# Altium PCB R-G-B_LED Module.PcbDoc
Units mm, origin at the board's own origin, x right, y up, seen from the top; angles counter-clockwise.
Board outline 30 x 18.5 mm, 2 copper layers (Top Layer, Bottom Layer), stack 1.571 mm thick; 3 components, 3 nets, 11 pads, 0 vias.
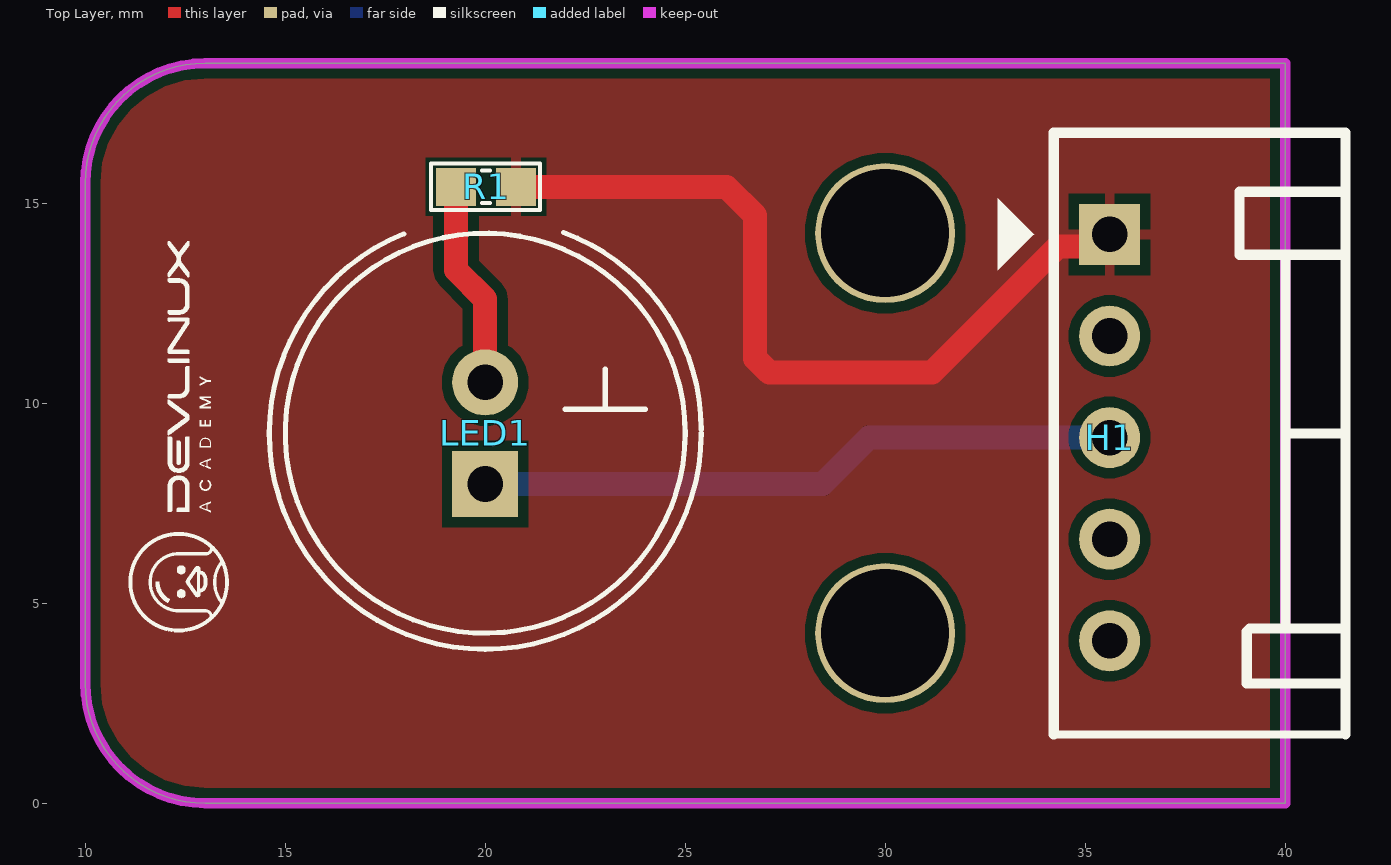
[diagram p0: Top Layer view]
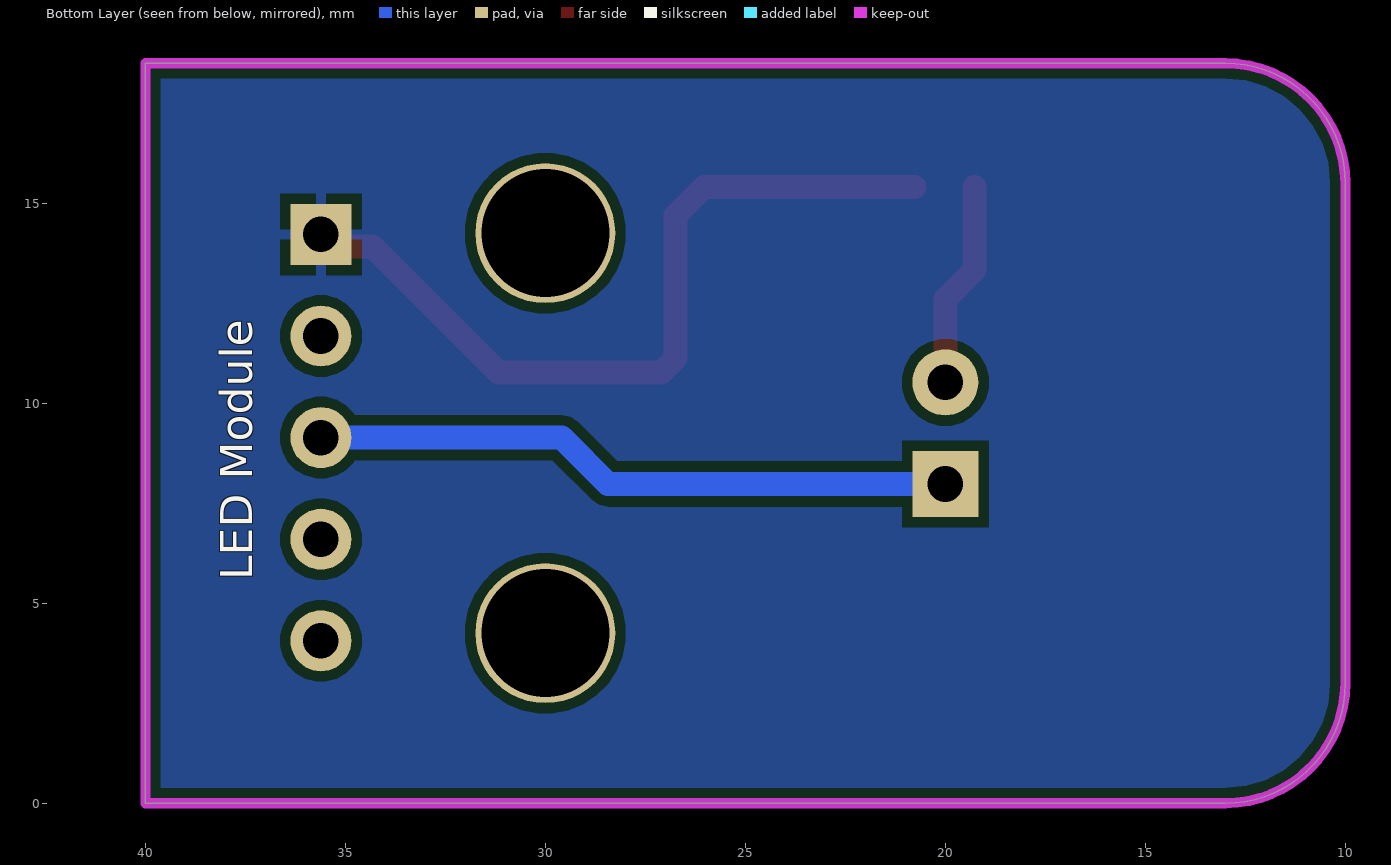
[diagram p1: Bottom Layer view, seen from below]

## Layer stack, top to bottom
Top Solder: solder mask 0.0102, Solder Resist, Dk 3.5
Top Layer: signal copper 0.0356
Dielectric 1: dielectric 1.5, FR-4, Dk 4.8
Bottom Layer: signal copper 0.0356
Bottom Solder: solder mask 0.0102, Solder Resist, Dk 3.5

## Board outline
10,3 ccw(c13,3) 13,0 40,0 40,18.5 13,18.5 ccw(c13,15.5) 10,15.5

## Design rules (kind name [scope] priority, off if disabled: settings)
Clearance [All] p1: gap=0.254 ignorepadtopadclearanceinfootprint=FALSE except(0: Arc-Hole Track-Hole SMDPad-Hole THPad-Hole Via-Hole Fill-Hole Poly-Hole Region-Hole Text-Hole; 0.178: Arc-SMDPad Arc-THPad Track-SMDPad Track-THPad SMDPad-SMDPad SMDPad-THPad THPad-THPad)
PolygonConnect [All] p1: connectstyle=Relief reliefconductorwidth=0.254 reliefentries=4 polygonreliefangle="90 Angle" airgapwidth=0.254
RoomDefinition "R-G-B_LED Module" [InComponentClass('R-G-B_LED Module')] p1: confinementstyle=ConfineIn formatcopy=TRUE lockcomponents=FALSE outline 63.664,8.314 77.38,8.314 77.38,39.556 63.664,39.556
RoutingVias [All] p1: holewidth=0.4 width=0.8 viastyle="Through Hole" minholewidth=0.3 minwidth=0.6 maxholewidth=0.5 maxwidth=1
SolderMaskExpansion [All] p1: expansion=0.102 istentingtop=FALSE
Width +5V [All] p1: maxlimit=0.6 minlimit=0.4 preferedwidth=0.5
Width NET [All] p2: maxlimit=0.5 minlimit=0.3 preferedwidth=0.4
30 further rules are at their usual default settings.

## Components (designator, comment, footprint, x,y, rotation, side; value= is the part's Value field where it differs from the comment)
H1 "5P 2.54" "Header 5P DC 2.54" 35.61,14.22 r0 top
LED1 "LED 10mm" LED2-2.54-D10MM 20,9.25 r90 top
R1 "470" "tro smd 0603" 20.02,15.41 r180 top

## Footprints (in the part's own frame and the unit in brackets; to place one, negate y for a bottom-side part, rotate by r counter-clockwise, add the part's x,y. Pads: shape width x height; smd on the part's side, far side on the other; paste and mask are expansions set on the pad)
"Header 5P DC 2.54" [mil]
  rect 60x60 hole 35: 1(0,0)
  round 60 hole 35: 2(0,-100) 3(0,-200) 4(0,-300) 5(0,-400)
  silkscreen extent -110,-492 232,100, body extent -87,-490 366,97, height 240
LED2-2.54-D10MM [mil]
  round 65 hole 35: NEG(49.99,0)
  rect 65x65 hole 35: POS(-49.99,0)
  silkscreen extent -213,-213 197,213
"tro smd 0603" [mm] "Chip Capacitor, 2-Leads, Body 1,60x0,80mm, IPC Medium Density"
  rect 1x0.95 smd mask+0.076: 1(-0.75,0) 2(0.75,0)
  silkscreen extent -1.35,-0.58 1.37,0.58, body extent -0.82,-0.42 0.82,0.43, height 0.44

## Part data
H1: library part "Header 5P 2.54 Duc Cong", "Cắm", Chung_Loai=Cắm, Don_Vi=Con, Ma_Hang=MH001308, Ten_Linh_Kien="Header 5P XH2.54-5P Đực Cong"
LED1: "304090142", Package=None, Availability=Unavailable, MP=DIP-LED-BLUE-BLUE-10MM(2P-D10MM), Price=None
R1: library part "Tro 0603 5% 330R", "Dán", Chung_Loai=Dán, Don_Vi=Con, Ma_Hang=MH006910, So_Chan=2, Ten_Linh_Kien="Trở 0603 5% 330R"

## Free pads (board coordinates)
  round 3.5 hole 3.2: 5(30,4.25) 5(30,14.25)

## Nets (pads, with @x,y where several pads share a name; then routed paths per layer and width w, separated by ;. In a path a pad name is that pad's centre, name@x,y a point inside that pad or via, vN(x,y) a via of type N, cw(c..) or ccw(c..) an arc to the next point about the centre after c; other vN are vias at no path point)
GND: H1.1 R1.1 | length 20.3
  Top Layer w0.6: R1.1 26.03,15.41 26.75,14.69 26.75,11.121 27.101,10.77 31.17,10.77 34.317,13.917 35.307,13.917 H1.1
NetH1_3: H1.3 LED1.POS | length 16.1
  Bottom Layer w0.6: LED1.POS 28.43,7.98 29.59,9.14 H1.3
NetLED1_NEG: LED1.NEG R1.2 | length 5.2
  Top Layer w0.6: R1.2 19.27,13.33 20,12.6 LED1.NEG
pads on no net: H1.2 H1.4 H1.5

## Polygon pours and split planes (outlines as drawn)
GND on Bottom Layer "GND_L02_P001" (solid, remove dead copper, pour order 1): -1.93,21.96 43.17,21.96 43.51,21.62 43.09,21.2 43.09,-2.14 -0.51,-2.14 -1.93,-3.56
GND on Top Layer "GND_L01_P002" (solid, remove dead copper, pour order 2): -1.43,22.63 -0.17,21.37 43.59,21.37 43.59,-3.48 43.17,-3.06 -1.51,-3.06

## Keep-outs
Keep-Out Layer:
  the board outline again, w0.254

## Silkscreen, mask and mechanical layers (free items; w line width, h text height)
Top Overlay:
  drawing of 21 lines, arcs and shapes, not listed
Bottom Overlay:
  text "LED Module" at 37.33,5.57 h0.8 r270